# EAGLE board Board (EAGLE 9.7.0)
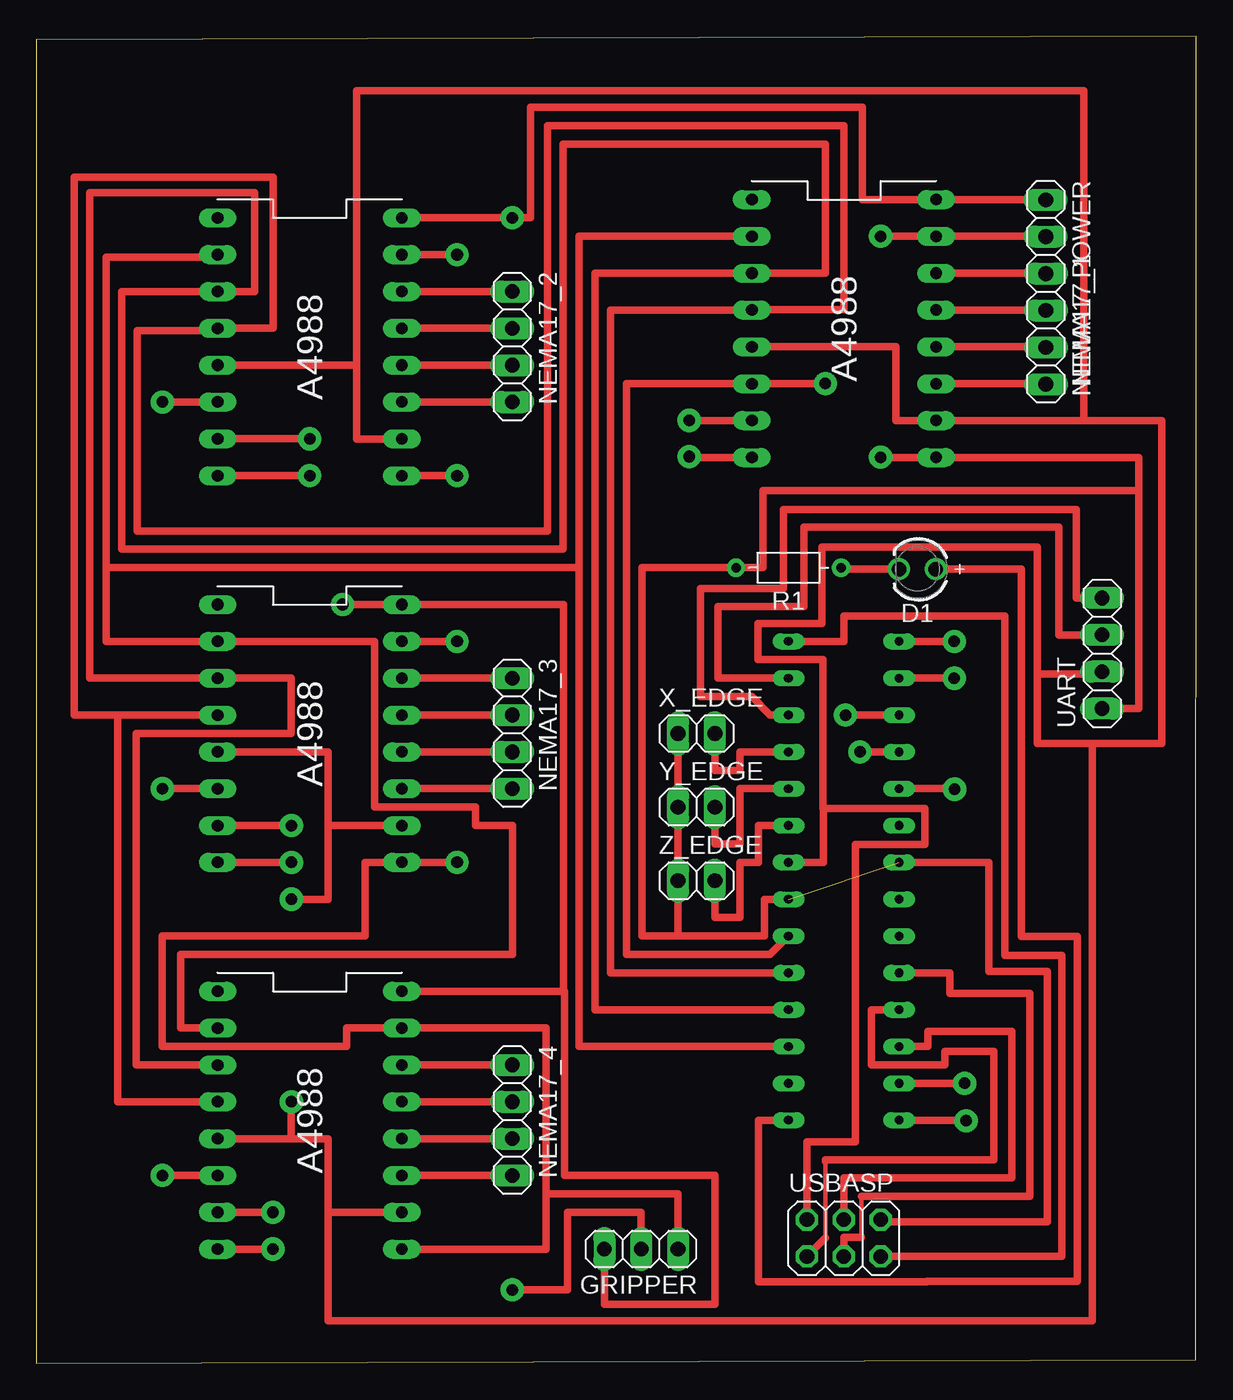
[diagram p0: board, top side]
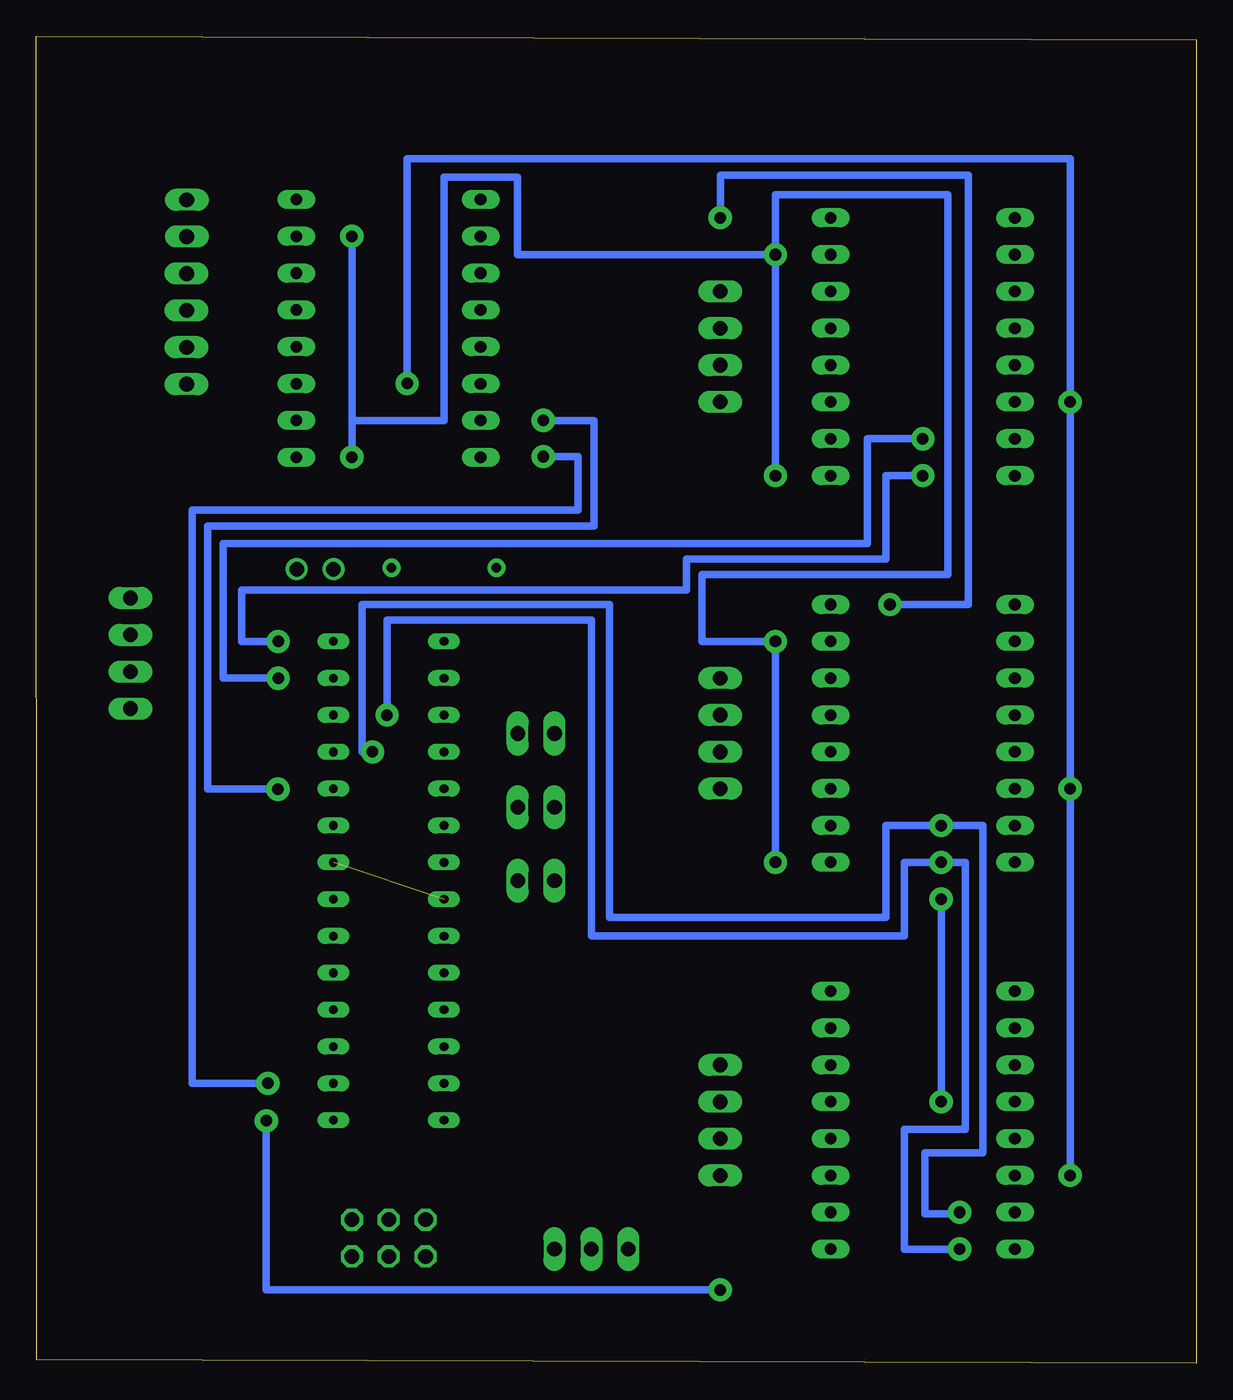
[diagram p1: board, bottom side, seen from below]

Size 80 x 91.51 mm. Coordinates in mm from the lower left corner, seen from the top.
Outline: 0,0 79.98,0.25 80,91.51 0,91.26 0,0
Copper layers (1*16): Top 0.035mm / dielectric 1.5mm / Bottom 0.035mm
Design rules "default *": minimum track width 0.5mm, minimum drill 0.35mm, track to track 0.1mm, track to pad 0.1mm, pad to pad 6mil, via to via 6mil, smd to smd 6mil, copper to edge 40mil, drill to drill 6mil, minimum pad ring 10mil, minimum via ring 8mil, stop-mask expansion 4mil, vias tented up to drill 0mil, thermal gap 10mil

## Footprints (pad centres in the part's own frame; a part is rotated, then mirrored left to right if it is on the bottom)
WL-TMRW_3MM_STOPPER = drill 1: 1 1.27,0.1; 2 -1.27,0.1
1X03 = drill 1.016 long: 1 -2.54,0; 2 0,0; 3 2.54,0
1X04 = drill 1.016 long: 1 -3.81,0; 2 -1.27,0; 3 1.27,0; 4 3.81,0
1X02 = drill 1.016 long: 1 -1.27,0; 2 1.27,0
RESAD724W46L381D178B = drill 0.66 pad 1.26: 1 -3.62,0; 2 3.62,0
ATMEGA168FOOTPRINT = drill 0.6 long: AREF 3.81,-2.54; AVCC 3.81,-5.08; GND -3.81,-2.54; GND1 3.81,0; PB0 -3.81,-17.78; PB1 3.81,-17.78; PB2 3.81,-15.24; PB3 3.81,-12.7; PB4 3.81,-10.16; PB5 3.81,-7.62; PB6 -3.81,-5.08; PB7 -3.81,-7.62; PC0 3.81,2.54; PC1 3.81,5.08; PC2 3.81,7.62; PC3 3.81,10.16; PC4 3.81,12.7; PC5 3.81,15.24; PC6 -3.81,15.24; PD0 -3.81,12.7; PD1 -3.81,10.16; PD2 -3.81,7.62; PD3 -3.81,5.08; PD4 -3.81,2.54; PD5 -3.81,-10.16; PD6 -3.81,-12.7; PD7 -3.81,-15.24; VCC -3.81,0
A498-FOOTPRINT = drill 0.8 long: 1A 6.35,-1.27; 1B 6.35,-3.81; 2A 6.35,1.27; 2B 6.35,3.81; DIR -6.35,-6.35; ENABLE -6.35,8.89; GND 6.35,-8.89; GND1 6.35,6.35; MS1 -6.35,6.35; MS2 -6.35,3.81; MS3 -6.35,1.27; RESET -6.35,-1.27; SLEEP -6.35,-3.81; STEP -6.35,-8.89; VCC 6.35,-6.35; VMOT 6.35,8.89
2X03 = drill 1.016 octagon: 1 -2.54,-1.27; 2 -2.54,1.27; 3 0,-1.27; 4 0,1.27; 5 2.54,-1.27; 6 2.54,1.27

## Placement (x,y rotation side)
D1  151033BS03000  [WL-TMRW_3MM_STOPPER]  60.77,54.86 180 top
GRIPPER  PINHD-1X3  [1X03]  41.72,7.87 180 top
NEMA17_1  PINHD-1X4  [1X04]  69.63,71.33 270 top
NEMA17_2  PINHD-1X4  [1X04]  32.83,70.1 270 top
NEMA17_3  PINHD-1X4  [1X04]  32.83,43.43 270 top
NEMA17_4  PINHD-1X4  [1X04]  32.83,16.76 270 top
NEMA17_POWER  PINHD-1X2  [1X02]  69.62,78.96 270 top
R1  220  [RESAD724W46L381D178B]  51.88,54.86 180 top
U$1  ATMEGA168  [ATMEGA168FOOTPRINT]  55.69,34.54 0 top
U$2  A4988  [A498-FOOTPRINT]  55.71,71.36 0 top
U$3  A4988  [A498-FOOTPRINT]  18.86,70.1 0 top
U$4  A4988  [A498-FOOTPRINT]  18.86,43.43 0 top
U$5  A4988  [A498-FOOTPRINT]  18.86,16.76 0 top
UART  PINHD-1X4  [1X04]  73.51,48.96 90 top
USBASP  PINHD-2X3  [2X03]  55.69,8.63 0 top
X_EDGE  PINHD-1X2  [1X02]  45.53,43.43 0 top
Y_EDGE  PINHD-1X2  [1X02]  45.53,38.35 0 top
Z_EDGE  PINHD-1X2  [1X02]  45.53,33.27 0 top

## Library data of the parts
D1 = Wurth_LEDs_WL-TMRW; CHIP-TECHNOLOGY: InGaN; DATASHEET-URL: https://www.we-online.com/redexpert/spec/151033BS03000?ae; DOMINANT-WAVELENGTH: 470nm; EMITTING-COLOR: Blue; FORWARD-VOLTAGE: 2.8V; LUMINOUS-INTENSITY: 3800mcd; PART-NUMBER: 151033BS03000; PEAK-WAVELENGTH: 465nm; VIEWING-ANGLE: 30°
GRIPPER NEMA17_1-NEMA17_4 NEMA17_POWER UART USBASP X_EDGE Y_EDGE Z_EDGE = Connector; CATEGORY: CONNECTOR; SUB-CATEGORY: PIN-HEADER
R1 = Resistor; CATEGORY: Resistor; SUB-CATEGORY: Fixed
U$1 = ATMEGA168
U$2-U$5 = A4988

## Nets
+5V: U$1.VCC U$2.RESET U$2.VCC U$3.RESET U$3.VCC U$4.RESET U$4.VCC U$5.RESET U$5.VCC UART.2 USBASP.2
GND: GRIPPER.1 NEMA17_POWER.2 R1.2 U$1.GND U$1.GND1 U$2.GND U$2.GND1 U$3.GND U$3.GND1 U$4.GND U$4.GND1 U$5.GND U$5.GND1 UART.1 USBASP.6 X_EDGE.1 Y_EDGE.1 Z_EDGE.1
N$1: U$1.PB3 USBASP.4
N$2: U$1.PB4 USBASP.1
N$3: U$1.PB5 USBASP.3
N$4: U$1.PC6 USBASP.5
N$5: D1.2 U$1.PB0
N$6: D1.1 R1.1
N$7: U$1.PD0 UART.3
N$8: U$1.PD1 UART.4
N$10: NEMA17_1.1 U$2.2B
N$11: NEMA17_1.2 U$2.2A
N$12: NEMA17_1.3 U$2.1A
N$13: NEMA17_1.4 U$2.1B
N$14: U$1.PB2 U$2.STEP
N$15: GRIPPER.3 NEMA17_POWER.1 U$2.VMOT U$3.VMOT U$4.VMOT U$5.VMOT
N$16: U$1.PC1 U$2.DIR
N$17: U$1.PB6 U$2.SLEEP U$3.SLEEP U$4.SLEEP U$5.SLEEP
N$18: U$1.PB7 U$2.MS3 U$3.MS3 U$4.MS3 U$5.MS3
N$19: U$1.PD5 U$2.MS2 U$3.MS2 U$4.MS2 U$5.MS2
N$20: U$1.PD6 U$2.MS1 U$3.MS1 U$4.MS1 U$5.MS1
N$21: NEMA17_2.4 U$3.1B
N$22: NEMA17_2.3 U$3.1A
N$23: NEMA17_2.2 U$3.2A
N$24: NEMA17_2.1 U$3.2B
N$25: U$1.PC5 U$3.STEP
N$26: U$1.PC4 U$3.DIR
N$27: NEMA17_3.4 U$4.1B
N$28: NEMA17_3.3 U$4.1A
N$29: NEMA17_3.2 U$4.2A
N$30: NEMA17_3.1 U$4.2B
N$31: U$1.PC3 U$4.STEP U$5.STEP
N$32: U$1.PC2 U$4.DIR U$5.DIR
N$33: NEMA17_4.4 U$5.1B
N$34: NEMA17_4.3 U$5.1A
N$35: NEMA17_4.2 U$5.2A
N$36: NEMA17_4.1 U$5.2B
N$37: U$1.PD2 X_EDGE.2
N$38: U$1.PD3 Y_EDGE.2
N$39: U$1.PD4 Z_EDGE.2
N$40: GRIPPER.2 U$1.PB1

## Tracks (layer width: path | path; a pad name or v marks a point on that pad's centre or on a via)
+5V  (via drill 0.8 pad 1.6)
  Top 0.5: U$2.RESET 59.28,70.09 59.28,65.01 U$2.VCC 72.23,65.01 | 72.23,65.01 77.63,65.01 77.63,42.74 72.82,42.74 | UART.2 73.51,47.52 69.03,47.52 | 69.03,47.52 69.03,42.74 72.82,42.74 | USBASP.2 53.15,15.27 56.49,15.27 56.49,35.77 61.28,35.77 61.28,38.27 54.28,38.27 | 54.28,38.27 54.26,38.27 54.26,48.52 49.78,48.52 49.78,51.02 54.17,51.02 54.17,56.27 69.03,56.27 69.03,47.52 | 54.28,38.27 54.28,34.52 51.88,34.52 U$1.VCC | 72.23,65.01 72.23,87.75 22.08,87.75 22.08,68.83 | 22.08,68.83 22.08,63.71 25.17,63.71 U$3.VCC | U$3.RESET 22.08,68.83 | U$5.RESET 17.59,15.49 | 17.59,15.49 20.13,15.49 20.13,10.41 | 20.13,10.41 U$5.VCC | U$4.RESET 20.13,42.16 20.13,37.08 | U$4.VCC 20.13,37.08 | 72.82,42.74 72.82,2.92 20.13,2.92 20.13,10.41 | 17.59,15.49 v17.59,18.03 | 20.13,37.08 20.13,32 v17.59,32
  Bottom 0.5: v17.59,32 v17.59,18.03
GND  (via drill 0.8 pad 1.6)  (1 unrouted)
  Top 0.5: USBASP.6 58.38,9.75 69.73,9.75 69.73,27.02 65.71,27.02 65.71,34.54 U$1.GND1 | UART.1 76.03,45.15 76.03,60.17 | 76.03,60.17 50.13,60.17 50.13,54.86 R1.2 41.78,54.86 41.78,29.46 44.26,29.46 | NEMA17_POWER.2 69.62,77.71 U$2.GND1 v58.23,77.71 v58.23,77.72 | 76.03,60.17 76.03,62.47 U$2.GND v58.23,62.47 v58.23,62.48 | U$5.GND 35.17,7.87 35.17,11.68 | X_EDGE.1 Y_EDGE.1 Z_EDGE.1 44.26,29.46 | U$1.GND 50.22,32 50.22,29.46 44.26,29.46 | GRIPPER.1 44.26,11.68 35.17,11.68 | 35.17,11.68 35.17,23.11 U$5.GND1 21.4,23.11 21.4,21.84 8.7,21.84 8.7,29.46 22.67,29.46 22.67,34.54 U$4.GND v29.02,34.54 | U$3.GND1 v29.02,76.45 | U$3.GND v29.02,61.21 | U$4.GND1 v29.02,49.78
  Bottom 0.5: v29.02,76.45 v29.02,61.21 | v29.02,76.45 29.02,80.6 17.12,80.6 17.12,54.39 34.1,54.39 34.1,49.78 v29.02,49.78 v29.02,34.54 | v29.02,76.45 46.8,76.45 46.8,81.8 51.88,81.8 51.88,65.02 58.23,65.02 | 58.23,65.02 v58.23,77.72 | v58.23,62.48 58.23,65.02
N$1
  Top 0.5: USBASP.4 55.69,12.77 67.28,12.77 67.28,22.87 61.5,22.87 61.5,21.84 U$1.PB3
N$2
  Top 0.3: 54.43,13.92 54.43,8.64
  Top 0.5: 54.43,8.64 USBASP.1 | 59.5,24.42 U$1.PB4 57.59,24.38 57.59,20.58 62.66,20.58 62.66,21.52 66.03,21.52 66.03,14.02 54.43,14.02 54.43,13.92
N$3
  Top 0.3: 56.9,8.69 56.9,11.52
  Top 0.5: USBASP.3 55.69,8.69 56.9,8.69 | 56.9,11.52 68.53,11.52 68.53,25.52 63,25.52 63,26.92 U$1.PB5
N$4
  Top 0.5: U$1.PC6 55.69,49.78 55.69,51.54 66.81,51.54 66.81,28.12 70.73,28.12 70.73,7.36 USBASP.5
N$5
  Top 0.5: U$1.PB0 49.81,16.76 49.81,5.63 61.43,5.63 61.43,5.64 71.78,5.64 71.78,29.42 67.93,29.42 67.93,54.76 D1.2
N$6
  Top 0.5: D1.1 55.5,54.76 R1.1
N$7
  Top 0.5: UART.3 70.53,50.23 70.53,57.67 52.93,57.67 52.93,52.17 47.03,52.17 47.03,47.24 U$1.PD0
N$8
  Top 0.5: UART.4 71.71,52.77 71.71,58.88 51.53,58.88 51.53,53.42 45.79,53.42 45.79,45.97 49.34,45.97 50.61,44.7 U$1.PD1
N$10
  Top 0.5: NEMA17_1.1 69.63,75.17 U$2.2B
N$11
  Top 0.5: NEMA17_1.2 69.63,72.63 U$2.2A
N$12
  Top 0.5: NEMA17_1.3 69.63,70.09 U$2.1A
N$13
  Top 0.5: NEMA17_1.4 69.63,67.55 U$2.1B
N$14  (via drill 0.8 pad 1.6)
  Top 0.5: v64.03,19.31 v64.03,19.3 U$1.PB2 | U$2.STEP 45.03,62.47 v45.03,62.52
  Bottom 0.5: v45.03,62.52 42.63,62.52 42.63,58.82 69.24,58.82 69.24,19.31 v64.03,19.31
N$15  (via drill 0.8 pad 1.6)
  Top 0.5: NEMA17_POWER.1 69.62,80.25 65.85,80.25 U$2.VMOT 56.96,80.25 56.96,86.61 34.1,86.61 34.1,78.99 v32.83,78.99 U$3.VMOT | 36.37,25.65 36.37,52.32 U$4.VMOT v21.13,52.32 | U$5.VMOT 36.37,25.65 | 36.37,25.65 36.44,25.65 36.44,12.95 46.8,12.95 46.8,4.06 39.18,4.06 GRIPPER.3
  Bottom 0.5: v32.83,78.99 32.83,81.92 15.73,81.92 15.73,52.32 v21.13,52.32
N$16  (via drill 0.8 pad 1.6)
  Top 0.5: U$2.DIR v45.03,65.01 v45.03,65.02 | U$1.PC1 63.33,39.62 v63.33,39.59
  Bottom 0.5: v45.03,65.02 41.53,65.02 41.53,57.72 68.19,57.72 68.19,39.59 v63.33,39.59
N$17  (via drill 0.8 pad 1.6)
  Top 0.5: U$1.PB6 50.61,28.19 40.7,28.19 40.7,67.56 U$2.SLEEP | U$3.SLEEP v8.7,66.29 | U$4.SLEEP v8.7,39.62 | U$5.SLEEP v8.7,12.95 | U$2.SLEEP | U$2.SLEEP v54.42,67.56
  Bottom 0.5: v8.7,12.95 v8.7,39.62 v8.7,66.29 8.7,83.07 54.42,83.07 v54.42,67.56
N$18
  Top 0.5: U$1.PB7 39.61,26.92 39.61,72.63 U$2.MS3 55.69,72.64 55.69,85.34 35.25,85.34 35.25,57.4 6.96,57.4 6.96,71.21 12.35,71.21 U$3.MS3 16.32,71.37 16.32,81.8 2.61,81.8 2.61,44.7 5.62,44.7 | U$4.MS3 5.62,44.7 | 5.62,44.7 5.62,18.03 U$5.MS3
N$19
  Top 0.5: U$1.PD5 38.52,24.38 38.52,75.17 U$2.MS2 54.42,75.18 54.42,84.07 36.32,84.07 36.32,56.13 5.89,56.13 5.89,73.91 U$3.MS2 15.05,73.91 15.05,80.73 3.68,80.73 3.68,47.24 U$4.MS2 17.59,47.24 17.59,43.43 6.89,43.43 6.89,20.57 U$5.MS2
N$20
  Top 0.5: U$2.MS1 37.44,77.71 37.44,54.86 | 37.44,54.86 4.83,54.86 | U$3.MS1 12.51,76.29 4.83,76.29 4.83,54.86 | U$5.MS1 9.97,23.11 9.97,28.19 32.83,28.19 32.83,37.08 30.29,37.08 30.29,38.35 23.35,38.35 23.35,49.78 U$4.MS1 4.83,49.78 4.83,54.86 | U$1.PD6 37.44,21.84 37.44,54.86
N$21
  Top 0.5: NEMA17_2.4 U$3.1B
N$22
  Top 0.5: NEMA17_2.3 U$3.1A
N$23
  Top 0.5: NEMA17_2.2 U$3.2A
N$24
  Top 0.5: NEMA17_2.1 U$3.2B
N$25  (via drill 0.8 pad 1.6)
  Top 0.5: U$1.PC5 v63.31,49.78 | U$3.STEP v18.86,61.21
  Bottom 0.5: v63.31,49.78 65.85,49.78 65.85,53.32 35.17,53.32 35.17,55.46 21.4,55.46 21.4,61.21 v18.86,61.21
N$26  (via drill 0.8 pad 1.6)
  Top 0.5: U$1.PC4 v63.31,47.24 | U$3.DIR v18.86,63.75
  Bottom 0.5: v18.86,63.75 22.67,63.75 22.67,56.53 67.12,56.53 67.12,47.24 v63.31,47.24
N$27
  Top 0.5: NEMA17_3.4 U$4.1B
N$28
  Top 0.5: NEMA17_3.3 U$4.1A
N$29
  Top 0.5: NEMA17_3.2 U$4.2A
N$30
  Top 0.5: NEMA17_3.1 U$4.2B
N$31  (via drill 0.8 pad 1.6)
  Top 0.5: v55.81,44.7 U$1.PC3 | U$4.STEP v17.59,34.54 | U$5.STEP v16.32,7.87
  Bottom 0.5: v55.81,44.7 55.81,51.25 41.72,51.25 41.72,29.46 20.13,29.46 20.13,34.54 v17.59,34.54 15.93,34.54 15.93,16.12 20.13,16.12 20.13,7.87 v16.32,7.87
N$32  (via drill 0.8 pad 1.6)
  Top 0.5: v56.81,42.16 U$1.PC2 | U$4.DIR v17.59,37.08 | U$5.DIR v16.32,10.41
  Bottom 0.5: v56.81,42.16 57.53,42.16 57.53,52.32 40.45,52.32 40.45,30.73 21.4,30.73 21.4,37.08 v17.59,37.08 14.73,37.08 14.73,14.52 18.73,14.52 18.73,10.32 16.32,10.32 v16.32,10.41
N$33
  Top 0.5: NEMA17_4.4 U$5.1B
N$34
  Top 0.5: NEMA17_4.3 U$5.1A
N$35
  Top 0.5: NEMA17_4.2 U$5.2A
N$36
  Top 0.5: NEMA17_4.1 U$5.2B
N$37
  Top 0.5: X_EDGE.2 46.8,40.89 48.54,40.89 48.54,42.16 U$1.PD2
N$38
  Top 0.5: Y_EDGE.2 46.8,35.81 48.54,35.81 48.54,39.62 U$1.PD3
N$39
  Top 0.5: Z_EDGE.2 46.8,30.73 48.54,30.73 48.54,34.54 49.82,34.54 49.82,37.08 U$1.PD4
N$40  (via drill 0.8 pad 1.6)
  Top 0.5: GRIPPER.2 41.72,10.41 36.64,10.41 36.64,5.06 v32.83,5.06 | U$1.PB1 64.13,16.76 v64.13,16.72
  Bottom 0.5: v32.83,5.06 64.13,5.06 v64.13,16.72